# Altium PCB DSD_PLC_SMALL.PcbDoc (part 1 of 2)
Units mil, origin at the board's own origin, x right, y up, seen from the top; angles counter-clockwise.
Board outline 2820 x 3490 mil, 2 copper layers (Top Layer, Bottom Layer); 165 components, 153 nets, 500 pads, 145 vias.
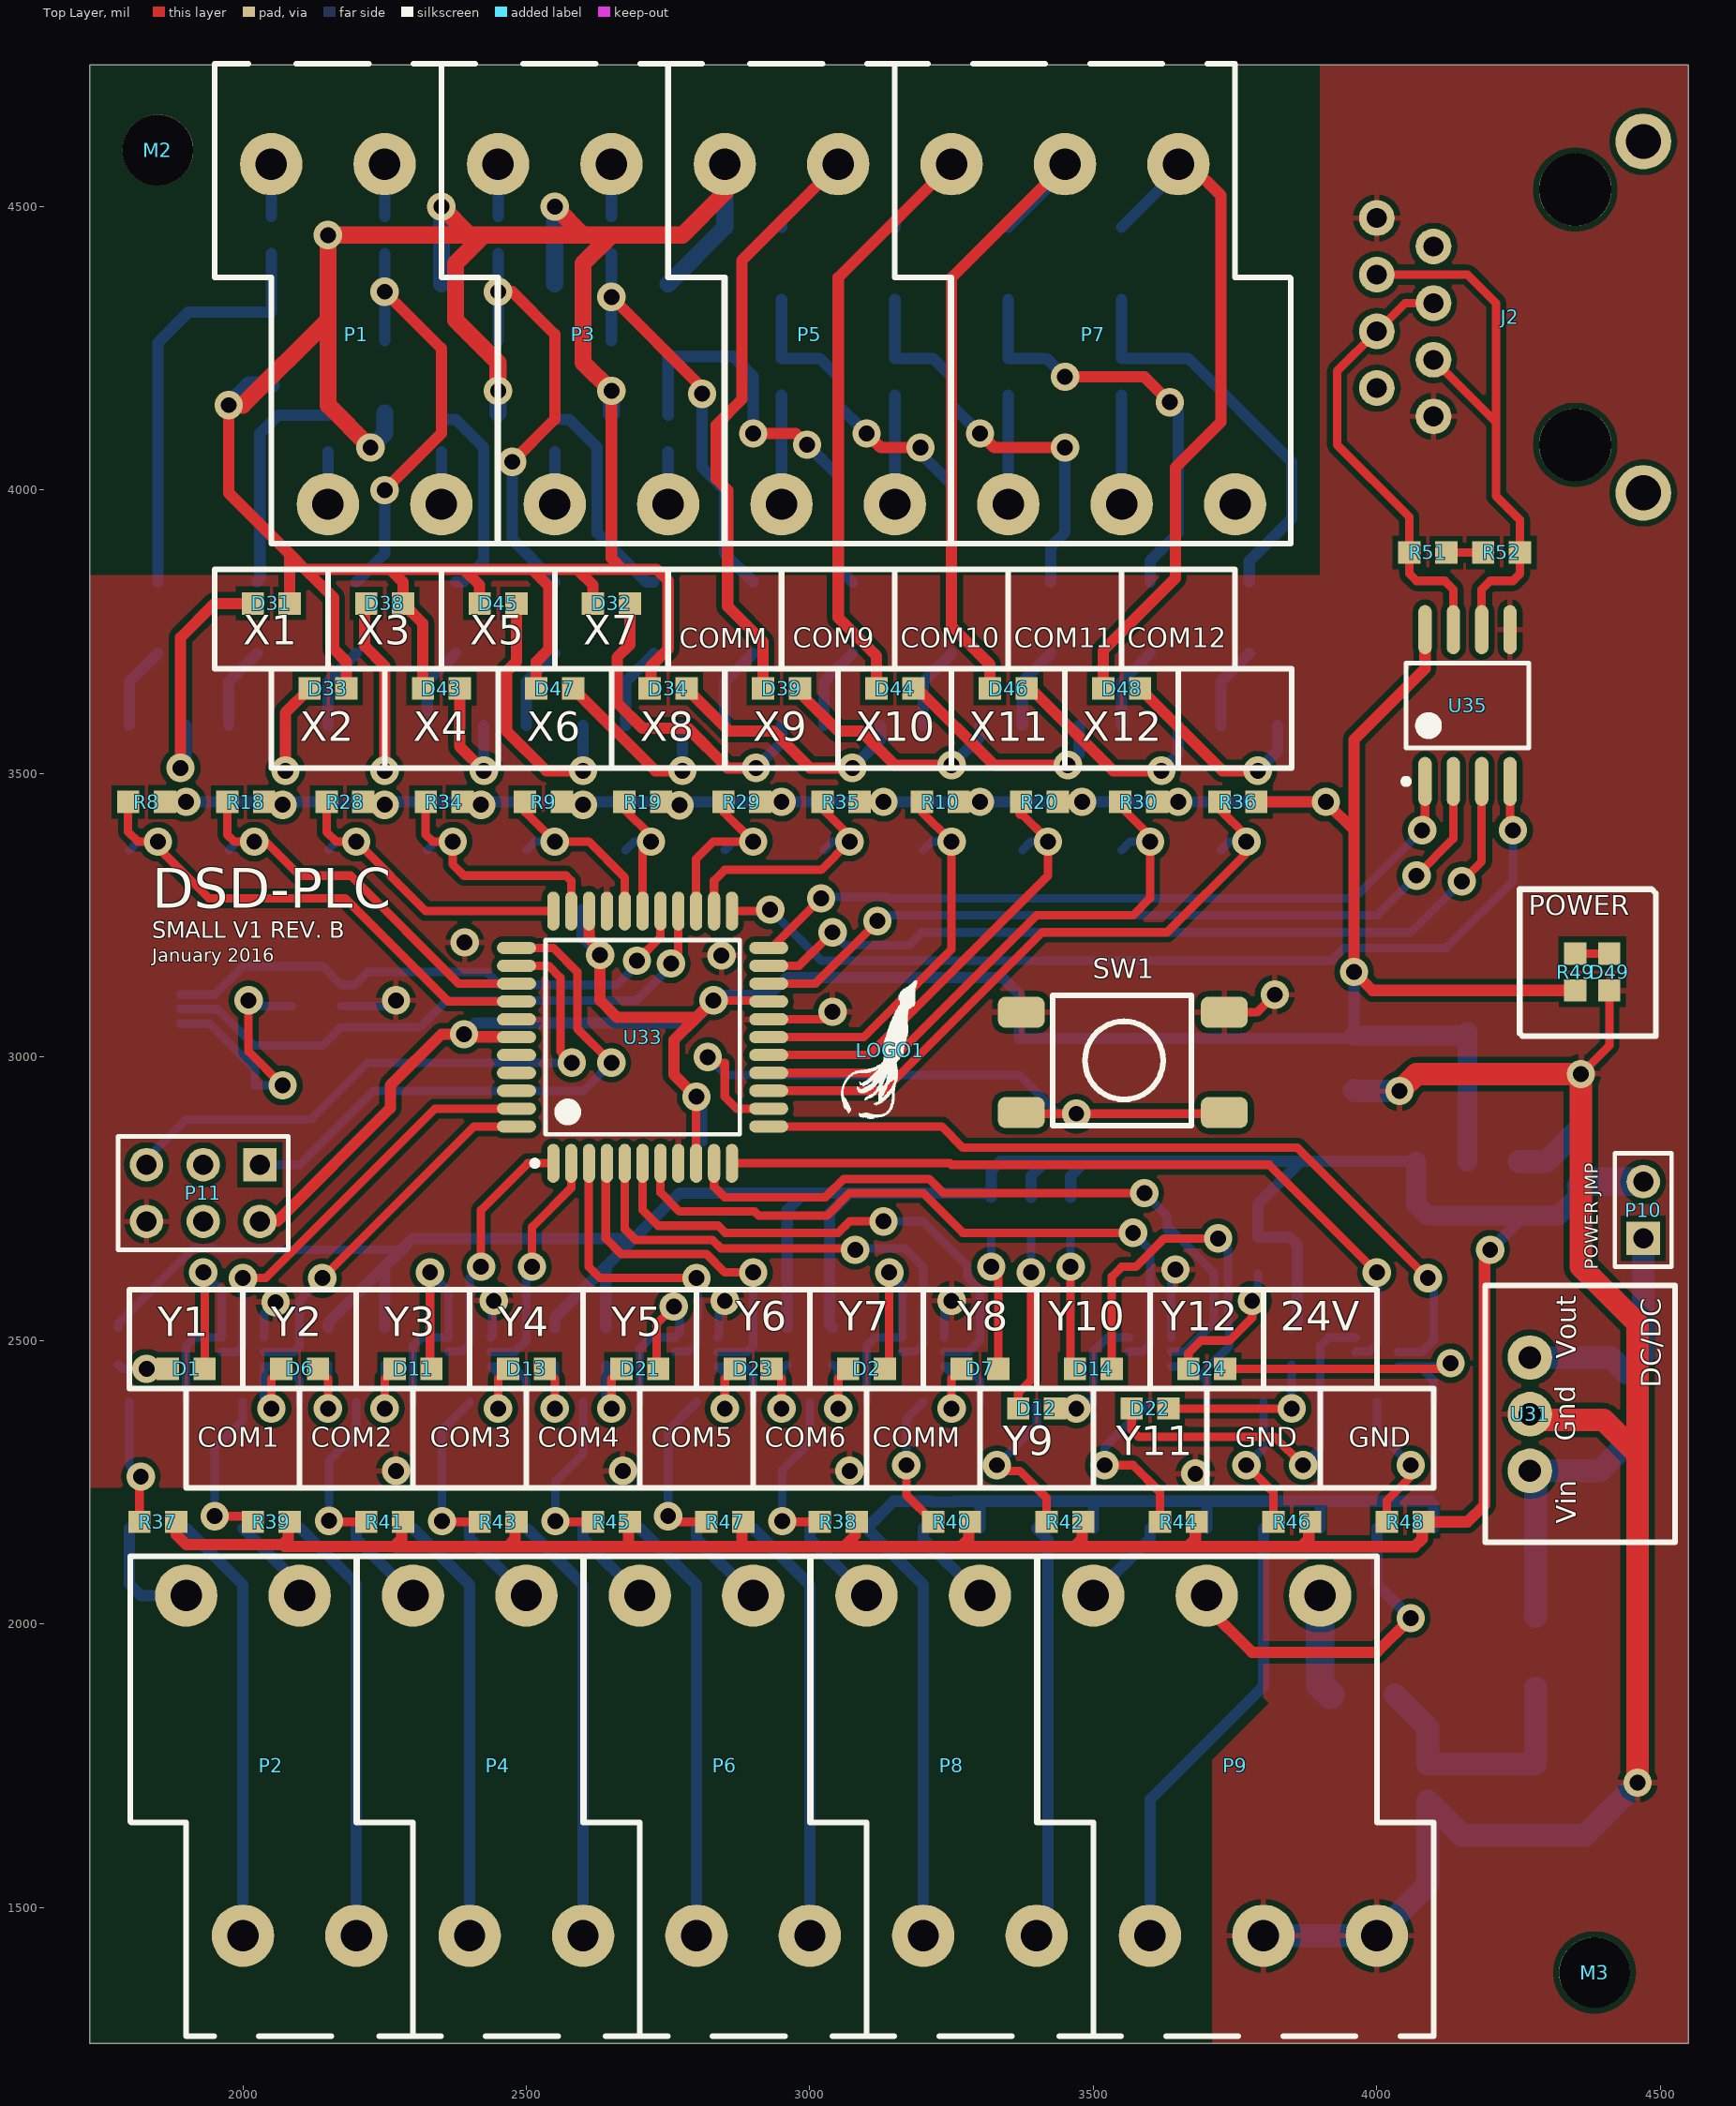
[diagram p0: Top Layer view]
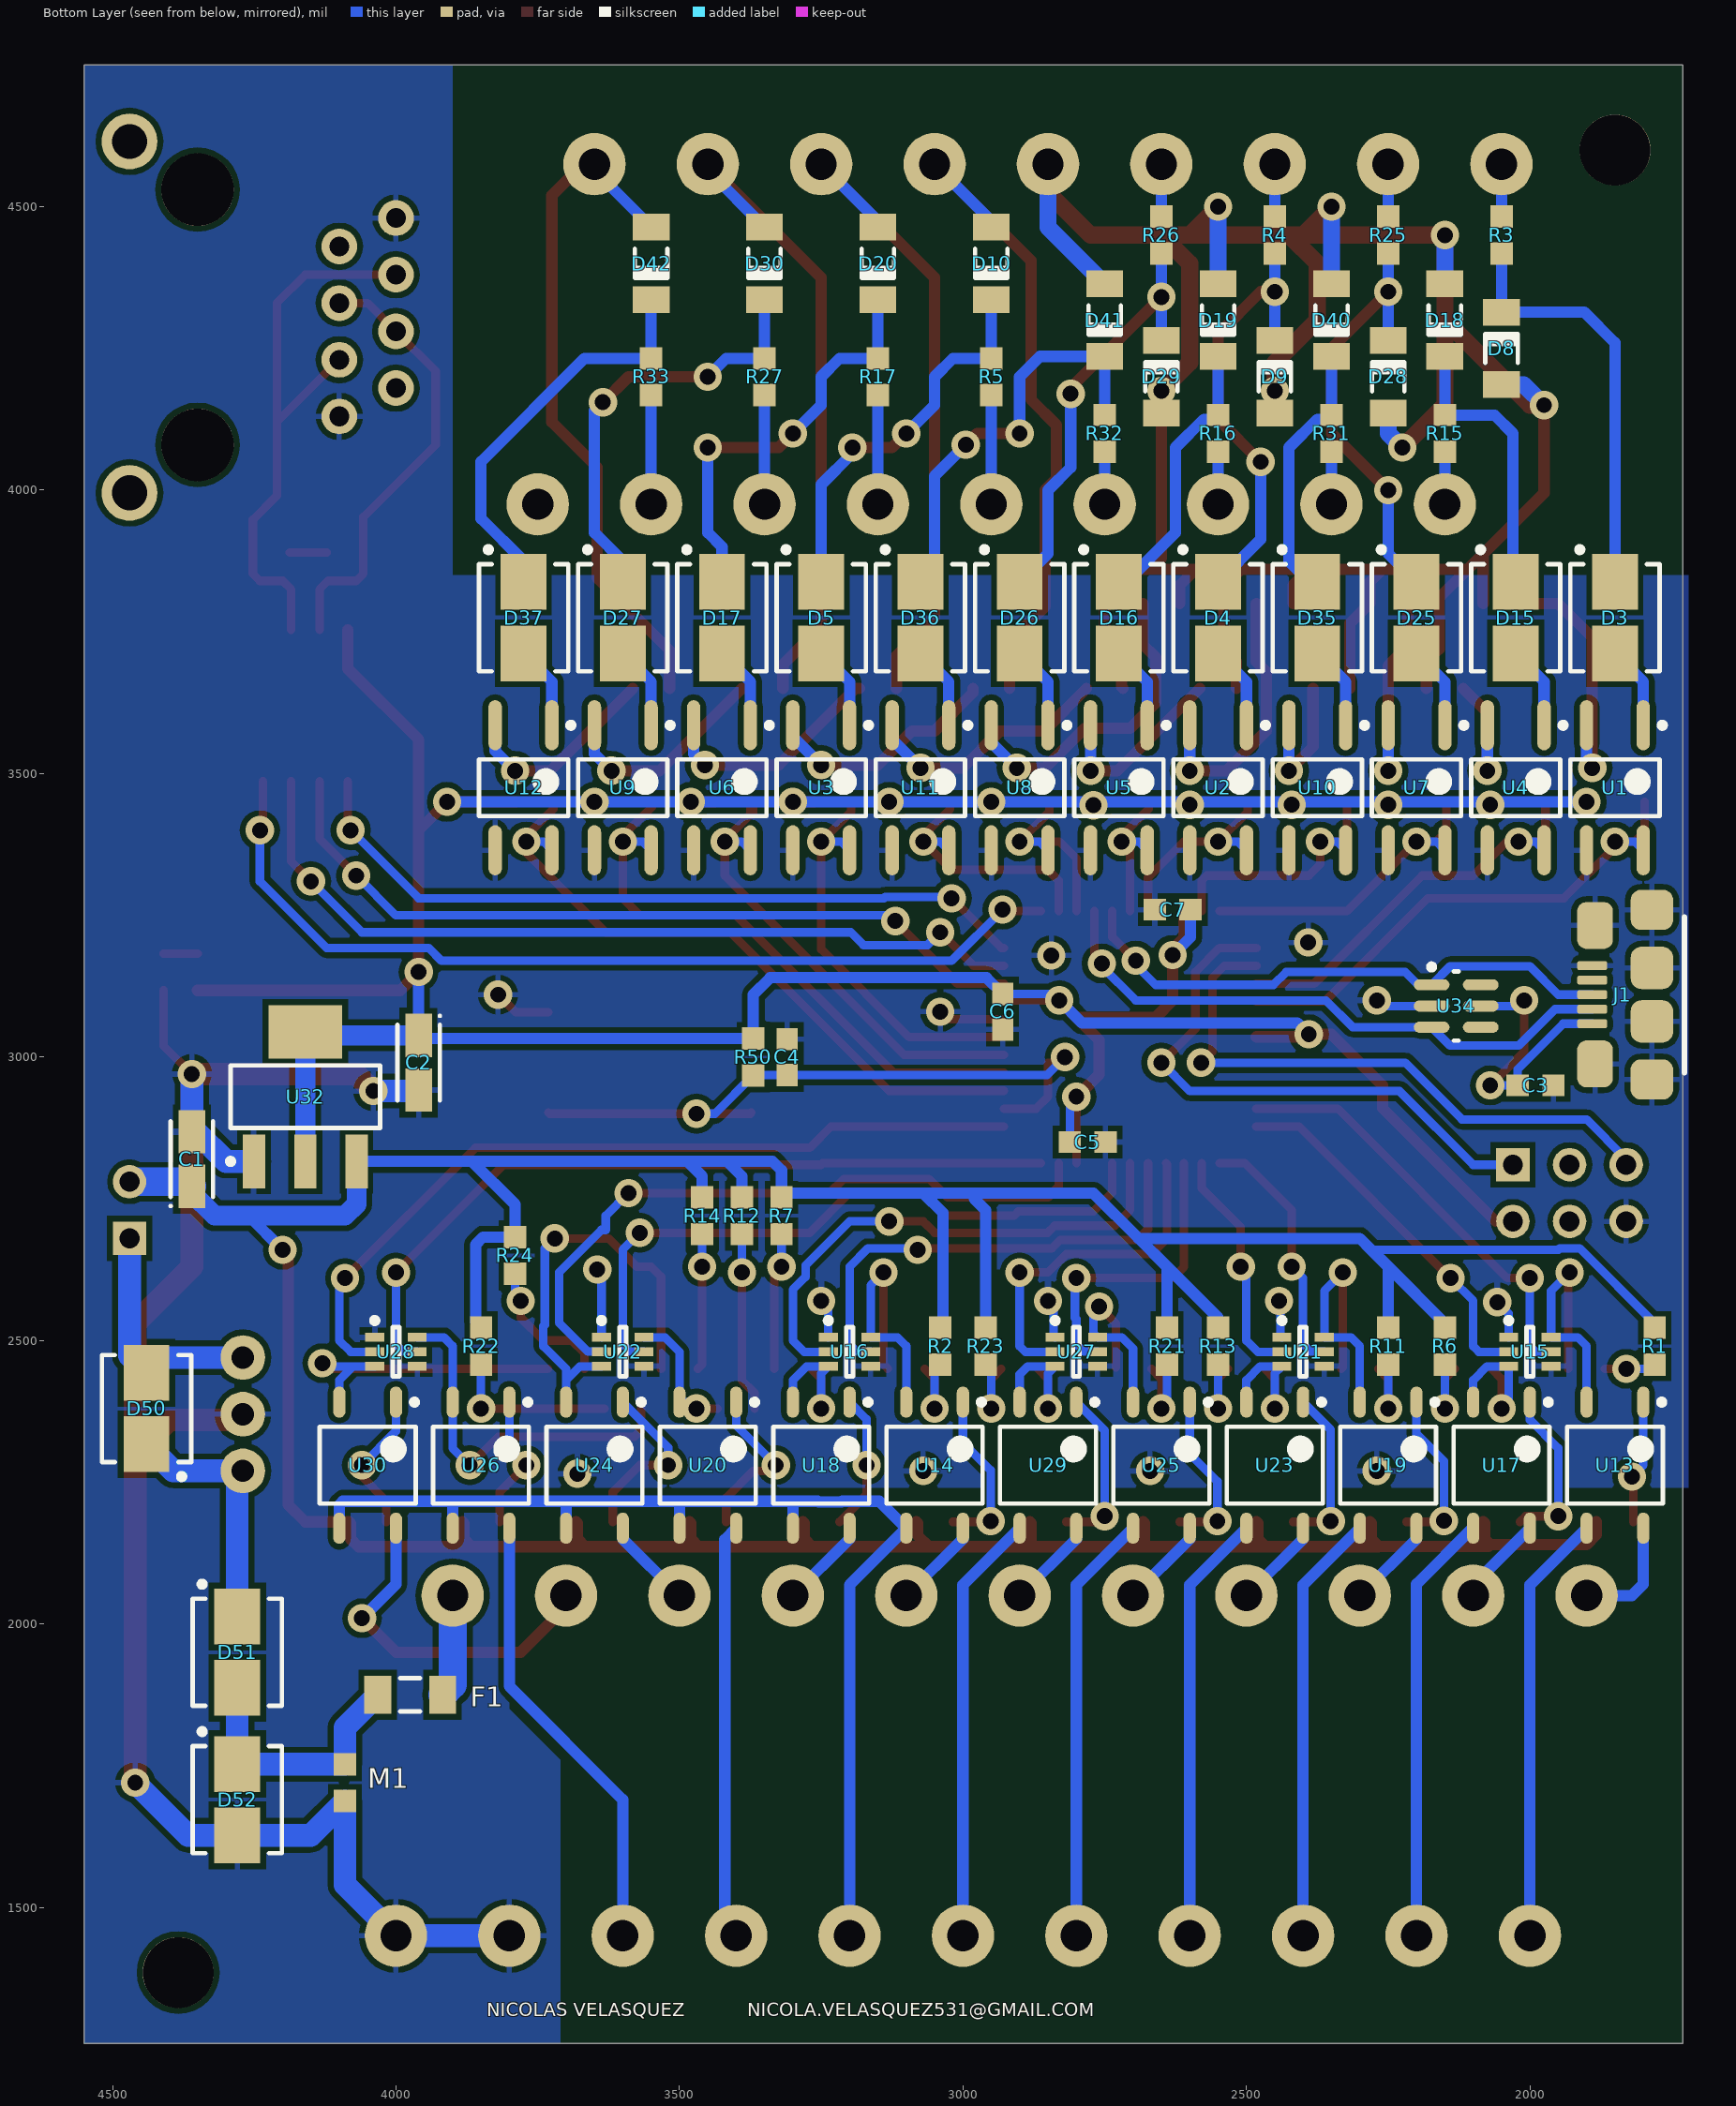
[diagram p1: Bottom Layer view, seen from below]

## Layer stack, top to bottom
Top Solder: solder mask 0.4, Solder Resist, Dk 3.5
Top Layer: signal copper 1.4
Dielectric1: dielectric 12.6, FR-4, Dk 4.8
Bottom Layer: signal copper 1.4
Bottom Solder: solder mask 0.4, Solder Resist, Dk 3.5

## Board outline
1730,4750 4550,4750 4550,1260 1730,1260 1730,4750

## Design rules (kind name [scope] priority, off if disabled: settings)
Clearance Fine_pitch [(HasFootprint('44A_N') OR HasFootprint('USB_MICRO_SMD') OR HasFootprint('SOT363_N')) vs (HasFootprint('44A_N') OR HasFootprint('USB_MICRO_SMD') OR HasFootprint('SOT363_N'))] p1: gap=8
Clearance [All] p2: gap=10
ComponentClearance Conection_blocks [(HasFootprint('block_conn 2 x 2') OR HasFootprint('block_conn 2 x 3')) vs (HasFootprint('block_conn 2 x 2') OR HasFootprint('block_conn 2 x 3'))] p1: gap=0 collisioncheckmode=3 verticalgap=0 showdistances=FALSE
ComponentClearance [All] p2: gap=10 collisioncheckmode=3 verticalgap=10 showdistances=FALSE
MinimumSolderMaskSliver [All] p1: minsoldermaskwidth=1
PolygonConnect [All] p1: connectstyle=Relief reliefconductorwidth=10 reliefentries=4 polygonreliefangle="90 Angle" airgapwidth=10
RoutingVias [All] p1: holewidth=28 width=50 viastyle="Through Hole" minholewidth=28 minwidth=50 maxholewidth=28 maxwidth=50
ShortCircuit ShortCircuit_1 [All] p1: allowed=FALSE
ShortCircuit [All] p2: allowed=FALSE
SilkToSilkClearance [All] p1: silktosilkclearance=5
SilkToSolderMaskClearance [IsPad] p1: minsilkscreentomaskgap=5 clearancetoexposedcopper=TRUE
SolderMaskExpansion SolderMaskExpansion_vias [IsVia] p1: expansion=-50
SolderMaskExpansion [All] p2: expansion=4
Width Width_Power [(InNet('3V3') OR InNet('5V') OR InNet('24V') OR InNet('IN_GND') OR InNet('COMM'))] p1: maxlimit=50 minlimit=15 preferedwidth=20
Width [All] p2: maxlimit=40 minlimit=10 preferedwidth=15
25 further rules are at their usual default settings.

## Classes and differential pairs
component class DSDPLC_IO: D1 D2 D3 D4 D5 D6 D7 D8 D9 D10 D11 D12 D13 D14 D15 D16 D17 D18 D19 D20 D21 D22 D23 D24 D25 D26 D27 D28 D29 D30 D31 D32 D33 D34 D35 D36 D37 D38 D39 D40 D41 D42 D43 D44 D45 D46 D47 D48 P1 P2 P3 P4 P5 P6 P7 P8 P9 R1 R2 R3 R4 R5 R6 R7 R8 R9 R10 R11 R12 R13 R14 R15 R16 R17 R18 R19 R20 R21 R22 R23 R24 R25 R26 R27 R28 R29 R30 R31 R32 R33 R34 R35 R36 R37 R38 R39 R40 R41 R42 R43 R44 R45 R46 R47 R48 U1 U2 U3 U4 U5 U6 U7 U8 U9 U10 U11 U12 U13 U14 U15 U16 U17 U18 U19 U20 U21 U22 U23 U24 U25 U26 U27 U28 U29 U30
component class DSDPLC_MCU: C1 C2 C3 C4 C5 C6 C7 D49 D50 D51 D52 F1 J1 J2 LOGO1 M1 M2 M3 P10 P11 R49 R50 R51 R52 R62 SW1 U31 U32 U33 U34 U35

## Components (designator, comment, footprint, x,y, rotation, side; value= is the part's Value field where it differs from the comment)
C1 "10uF" C_TANT_A_3216_N 4360,2820 r90 bottom
C2 "10uF" C_TANT_A_3216_N 3960,2990 r270 bottom
C3 "0.1uF" C0603_N 1990,2950 r0 bottom
C4 "0.1uF" C0603_N 3310,3000 r90 bottom
C5 "0.1uF" C0603_N 2780,2850 r0 bottom
C6 "0.1uF" C0603_N 2930,3080 r90 bottom
C7 "0.1uF" C0603_N 2630,3260 r180 bottom
D1 "Green" R0603_N 1900,2450 r0 top
D2 "Green" R0603_N 3100,2450 r0 top
D3 "SMBJ5344B-TP" SMB_N 1850,3775 r90 bottom
D4 "SMBJ5344B-TP" SMB_N 2550,3775 r90 bottom
D5 "SMBJ5344B-TP" SMB_N 3250,3775 r90 bottom
D6 "Green" R0603_N 2100,2450 r180 top
D7 "Green" R0603_N 3300,2450 r180 top
D8 "LL4148" SOD-80_N 2050,4250 r90 bottom
D9 "LL4148" SOD-80_N 2450,4200 r90 bottom
D10 "LL4148" SOD-80_N 2950,4400 r270 bottom
D11 "Green" R0603_N 2300,2450 r0 top
D12 "Green" R0603_N 3400,2380 r0 top
D13 "Green" R0603_N 2500,2450 r180 top
D14 "Green" R0603_N 3500,2450 r0 top
D15 "SMBJ5344B-TP" SMB_N 2025,3775 r90 bottom
D16 "SMBJ5344B-TP" SMB_N 2725,3775 r90 bottom
D17 "SMBJ5344B-TP" SMB_N 3425,3775 r90 bottom
D18 "LL4148" SOD-80_N 2150,4300 r270 bottom
D19 "LL4148" SOD-80_N 2550,4300 r270 bottom
D20 "LL4148" SOD-80_N 3150,4400 r270 bottom
D21 "Green" R0603_N 2700,2450 r0 top
D22 "Green" R0603_N 3600,2380 r180 top
D23 "Green" R0603_N 2900,2450 r180 top
D24 "Green" R0603_N 3700,2450 r0 top
D25 "SMBJ5344B-TP" SMB_N 2200,3775 r90 bottom
D26 "SMBJ5344B-TP" SMB_N 2900,3775 r90 bottom
D27 "SMBJ5344B-TP" SMB_N 3600,3775 r90 bottom
D28 "LL4148" SOD-80_N 2250,4200 r90 bottom
D29 "LL4148" SOD-80_N 2650,4200 r90 bottom
D30 "LL4148" SOD-80_N 3350,4400 r270 bottom
D31 "Green" R0603_N 2050,3800 r0 top
D32 "Green" R0603_N 2650,3800 r180 top
D33 "Green" R0603_N 2150,3650 r0 top
D34 "Green" R0603_N 2750,3650 r180 top
D35 "SMBJ5344B-TP" SMB_N 2375,3775 r90 bottom
D36 "SMBJ5344B-TP" SMB_N 3075,3775 r90 bottom
D37 "SMBJ5344B-TP" SMB_N 3775,3775 r90 bottom
D38 "Green" R0603_N 2250,3800 r0 top
D39 "Green" R0603_N 2950,3650 r180 top
D40 "LL4148" SOD-80_N 2350,4300 r270 bottom
D41 "LL4148" SOD-80_N 2750,4300 r270 bottom
D42 "LL4148" SOD-80_N 3550,4400 r270 bottom
D43 "Green" R0603_N 2350,3650 r180 top
D44 "Green" R0603_N 3150,3650 r180 top
D45 "Green" R0603_N 2450,3800 r180 top
D46 "Green" R0603_N 3350,3650 r180 top
D47 "Green" R0603_N 2550,3650 r180 top
D48 "Green" R0603_N 3550,3650 r180 top
D49 "Green" R0603_N 4410,3150 r270 top
D50 "S1BB-13-F" SMB_N 4440,2380 r270 bottom
D51 "S1BB-13-F" SMB_N 4280,1950 r90 bottom
D52 "S1BB-13-F" SMB_N 4280,1690 r90 bottom
F1 "1206L150THWR" R1206_N 3975,1875 r0 bottom
J1 "MICRO_USB" USB_MICRO_SMD 1890,3110 r90 bottom
J2 "RJ45" rj45 4100,4130 r90 top
LOGO1 "Logo_DeepSea" DeepSea_logo1 3142,3012 r0 top
M1 "EZJ-Z1V420FA" R0603_N 4090,1720 r270 bottom
M2 "MountingHole-1/8in" MoutingHole-1/8in 1850,4600 r0 top
M3 "MountingHole-1/8in" MoutingHole-1/8in 4384,1385 r0 top
P1 "BLOCK_CONN2X2" "block_conn 2 x 2" 2350,3975 r180 top
P2 "BLOCK_CONN2X2" "block_conn 2 x 2" 1900,2050 r0 top
P3 "BLOCK_CONN2X2" "block_conn 2 x 2" 2750,3975 r180 top
P4 "BLOCK_CONN2X2" "block_conn 2 x 2" 2300,2050 r0 top
P5 "BLOCK_CONN2X2" "block_conn 2 x 2" 3150,3975 r180 top
P6 "BLOCK_CONN2X2" "block_conn 2 x 2" 2700,2050 r0 top
P7 "BLOCK_CONN2X3" "block_conn 2 x 3" 3750,3975 r180 top
P8 "BLOCK_CONN2X2" "block_conn 2 x 2" 3100,2050 r0 top
P9 "BLOCK_CONN2X3" "block_conn 2 x 3" 3500,2050 r0 top
P10 "Header 2" HDR1X2 4470,2680 r90 top
P11 "Header 3X2" HDR2X3 2030,2810 r180 top
R1 "R_SMD" R0603_N 1780,2490 r270 bottom
R2 "R_SMD" R0603_N 3040,2490 r270 bottom
R3 "R_SMD" R0603_N 2050,4450 r90 bottom
R4 "R_SMD" R0603_N 2450,4450 r90 bottom
R5 "R_SMD" R0603_N 2950,4200 r270 bottom
R6 "R_SMD" R0603_N 2150,2490 r270 bottom
R7 "R_SMD" R0603_N 3320,2720 r270 bottom
R8 "R_SMD" R0603_N 1830,3450 r0 top
R9 "R_SMD" R0603_N 2530,3450 r0 top
R10 "R_SMD" R0603_N 3230,3450 r0 top
R11 "R_SMD" R0603_N 2250,2490 r270 bottom
R12 "R_SMD" R0603_N 3390,2720 r270 bottom
R13 "R_SMD" R0603_N 2550,2490 r270 bottom
R14 "R_SMD" R0603_N 3460,2720 r270 bottom
R15 "R_SMD" R0603_N 2150,4100 r270 bottom
R16 "R_SMD" R0603_N 2550,4100 r270 bottom
R17 "R_SMD" R0603_N 3150,4200 r270 bottom
R18 "R_SMD" R0603_N 2005,3450 r0 top
R19 "R_SMD" R0603_N 2705,3450 r0 top
R20 "R_SMD" R0603_N 3405,3450 r0 top
R21 "R_SMD" R0603_N 2640,2490 r270 bottom
R22 "R_SMD" R0603_N 3850,2490 r270 bottom
R23 "R_SMD" R0603_N 2960,2490 r270 bottom
R24 "R_SMD" R0603_N 3790,2650 r270 bottom
R25 "R_SMD" R0603_N 2250,4450 r90 bottom
R26 "R_SMD" R0603_N 2650,4450 r90 bottom
R27 "R_SMD" R0603_N 3350,4200 r270 bottom
R28 "R_SMD" R0603_N 2180,3450 r0 top
R29 "R_SMD" R0603_N 2880,3450 r0 top
R30 "R_SMD" R0603_N 3580,3450 r0 top
R31 "R_SMD" R0603_N 2350,4100 r270 bottom
R32 "R_SMD" R0603_N 2750,4100 r270 bottom
R33 "R_SMD" R0603_N 3550,4200 r270 bottom
R34 "R_SMD" R0603_N 2355,3450 r0 top
R35 "R_SMD" R0603_N 3055,3450 r0 top
R36 "R_SMD" R0603_N 3755,3450 r0 top
R37 "R_SMD" R0603_N 1850,2180 r0 top
R38 "R_SMD" R0603_N 3050,2180 r0 top
R39 "R_SMD" R0603_N 2050,2180 r0 top
R40 "R_SMD" R0603_N 3250,2180 r0 top
R41 "R_SMD" R0603_N 2250,2180 r0 top
R42 "R_SMD" R0603_N 3450,2180 r0 top
R43 "R_SMD" R0603_N 2450,2180 r0 top
R44 "R_SMD" R0603_N 3650,2180 r0 top
R45 "R_SMD" R0603_N 2650,2180 r0 top
R46 "R_SMD" R0603_N 3850,2180 r0 top
R47 "R_SMD" R0603_N 2850,2180 r0 top
R48 "R_SMD" R0603_N 4050,2180 r0 top
R49 "R_SMD" R0603_N 4350,3150 r90 top
R50 "10K" R0603_N 3370,3000 r90 bottom
R51 "120" R0603_N 4090,3890 r180 top
R52 "0R" R0603_N 4220,3890 r180 top
SW1 "SWITCH" swich_foot 3373,3079 r0 top
U1 "TLP185(GR,E)" "SOIC6 (4 leads)" 1850,3475 r270 bottom
U2 "TLP185(GR,E)" "SOIC6 (4 leads)" 2550,3475 r270 bottom
U3 "TLP185(GR,E)" "SOIC6 (4 leads)" 3250,3475 r270 bottom
U4 "TLP185(GR,E)" "SOIC6 (4 leads)" 2025,3475 r270 bottom
U5 "TLP185(GR,E)" "SOIC6 (4 leads)" 2725,3475 r270 bottom
U6 "TLP185(GR,E)" "SOIC6 (4 leads)" 3425,3475 r270 bottom
U7 "TLP185(GR,E)" "SOIC6 (4 leads)" 2200,3475 r270 bottom
U8 "TLP185(GR,E)" "SOIC6 (4 leads)" 2900,3475 r270 bottom
U9 "TLP185(GR,E)" "SOIC6 (4 leads)" 3600,3475 r270 bottom
U10 "TLP185(GR,E)" "SOIC6 (4 leads)" 2375,3475 r270 bottom
U11 "TLP185(GR,E)" "SOIC6 (4 leads)" 3075,3475 r270 bottom
U12 "TLP185(GR,E)" "SOIC6 (4 leads)" 3775,3475 r270 bottom
U13 "CPC1020NTR" SOP4_N 1850,2280 r270 bottom
U14 "CPC1020NTR" SOP4_N 3050,2280 r270 bottom
U15 "MUN5213DW1T1G" SOT363_N 2000,2480 r180 bottom
U16 "MUN5213DW1T1G" SOT363_N 3200,2480 r180 bottom
U17 "CPC1020NTR" SOP4_N 2050,2280 r270 bottom
U18 "CPC1020NTR" SOP4_N 3250,2280 r270 bottom
U19 "CPC1020NTR" SOP4_N 2250,2280 r270 bottom
U20 "CPC1020NTR" SOP4_N 3450,2280 r270 bottom
U21 "MUN5213DW1T1G" SOT363_N 2400,2480 r180 bottom
U22 "MUN5213DW1T1G" SOT363_N 3600,2480 r180 bottom
U23 "CPC1020NTR" SOP4_N 2450,2280 r270 bottom
U24 "CPC1020NTR" SOP4_N 3650,2280 r270 bottom
U25 "CPC1020NTR" SOP4_N 2650,2280 r270 bottom
U26 "CPC1020NTR" SOP4_N 3850,2280 r270 bottom
U27 "MUN5213DW1T1G" SOT363_N 2800,2480 r180 bottom
U28 "MUN5213DW1T1G" SOT363_N 4000,2480 r180 bottom
U29 "CPC1020NTR" SOP4_N 2850,2280 r270 bottom
U30 "CPC1020NTR" SOP4_N 4050,2280 r270 bottom
U31 "R-78B5.0-1.0" SIP3_RECOM 4270,2270 r90 top
U32 "LM1117MPX-3.3/NOPB" MP04A_N 4160,2930 r90 bottom
U33 "ATXMEGA32A4U-AU" 44A_N 2705,3035 r90 top
U34 "IP4220CZ6,125" SOT457_N 2130,3090 r180 bottom
U35 "ST3485ECDR" SOIC8WA_N 4160,3620 r90 top

## Footprints (in the part's own frame and the unit in brackets; to place one, negate y for a bottom-side part, rotate by r counter-clockwise, add the part's x,y. Pads: shape width x height; smd on the part's side, far side on the other; paste and mask are expansions set on the pad)
44A_N [mm] "Thin QFP, 44-Leads, Body 10x10mm, Pitch 0.8mm, IPC Medium Density"
  oval 1.75x0.55 smd: 1(-5.65,4) 2(-5.65,3.2) 3(-5.65,2.4) 4(-5.65,1.6) 5(-5.65,0.8) 6(-5.65,0) 7(-5.65,-0.8) 8(-5.65,-1.6) 9(-5.65,-2.4) 10(-5.65,-3.2) 11(-5.65,-4) 23(5.65,-4) 24(5.65,-3.2) 25(5.65,-2.4) 26(5.65,-1.6) 27(5.65,-0.8) 28(5.65,0) 29(5.65,0.8) 30(5.65,1.6) 31(5.65,2.4) 32(5.65,3.2) 33(5.65,4)
  oval 0.55x1.75 smd: 12(-4,-5.65) 13(-3.2,-5.65) 14(-2.4,-5.65) 15(-1.6,-5.65) 16(-0.8,-5.65) 17(0,-5.65) 18(0.8,-5.65) 19(1.6,-5.65) 20(2.4,-5.65) 21(3.2,-5.65) 22(4,-5.65) 34(4,5.65) 35(3.2,5.65) 36(2.4,5.65) 37(1.6,5.65) 38(0.8,5.65) 39(0,5.65) 40(-0.8,5.65) 41(-1.6,5.65) 42(-2.4,5.65) 43(-3.2,5.65) 44(-4,5.65)
  silkscreen extent -5.77,-4.35 4.35,4.95, body extent -5,-5 5,5, height 1.2
"block_conn 2 x 2" [mil]
  round 110 hole 55.12: 1(0,0) 2(100,-600) 3(200,0) 4(300,-600)
  silkscreen extent -98,-778 400,69
"block_conn 2 x 3" [mil]
  round 110 hole 55.12: 1(0,0) 2(100,-600) 3(200,0) 4(300,-600) 5(400,0) 6(500,-600)
  silkscreen extent -98,-778 600,69
C0603_N [mm] "Chip Capacitor, 2-Leads, Body 1,60x0,80mm, IPC Medium Density"
  rect 1x0.95 smd: 1(-0.8,0) 2(0.8,0)
  body extent -0.88,-0.48 0.87,0.48, height 0.85
C_TANT_A_3216_N [mm] "Molded Capacitor, 2-Leads, Body 3,20x1,60mm, IPC Medium Density"
  rect 1.95x1.2 smd: 1(-1.225,0) 2(1.225,0)
  silkscreen extent -2.15,-0.95 1.7,1, body extent -1.7,-0.9 1.7,0.9, height 1.8
DeepSea_logo1 [mil]
  silkscreen extent -87,-120 47,123
HDR1X2 [mm] "Connector; Header; 2 Position"
  rect 1.5x1.5 hole 0.9: 1(0,0)
  round 1.5 hole 0.9: 2(2.54,0)
  silkscreen extent -1.27,-1.27 3.81,1.27
HDR2X3 [mm] "Connector; Header; 3x2 Position"
  rect 1.5x1.5 hole 0.9: 1(0,0)
  round 1.5 hole 0.9: 2(0,2.54) 3(2.54,0) 4(2.54,2.54) 5(5.08,0) 6(5.08,2.54)
  silkscreen extent -1.27,-1.27 6.35,3.81
MoutingHole-1/8in [mil]
  round 125 hole 125: 0(0,0)
MP04A_N [mm] "SOT223, 4-Leads, Body 6.5x3.5mm, Pitch 2.3mm, Lead Span 7mm, IPC Medium Density"
  rect 2.4x1 smd: 1(-2.9,2.3) 2(-2.9,0) 3(-2.9,-2.3)
  rect 2.4x3.3 smd: 4(2.9,0)
  silkscreen extent -3.02,-3.35 1.4,3.48, body extent -1.85,-3.35 1.85,3.35, height 1.8
R0603_N [mm] "Chip Resistor, 2-Leads, Body 1,60x0,85mm, IPC Medium Density"
  rect 1x1 smd: 1(-0.825,0) 2(0.825,0)
  body extent -0.87,-0.48 0.87,0.47, height 0.45
R1206_N [mm] "Chip Resistor, 2-Leads, Body 3,13x1,55mm, IPC Medium Density"
  rect 1.2x1.7 smd: 1(-1.45,0) 2(1.45,0)
  silkscreen extent -0.45,-0.75 0.45,0.75, body extent -1.63,-0.82 1.63,0.82, height 0.6
rj45 [mm]
  round 1.6 hole 0.89: 1(0,0) 2(1.27,2.54) 3(2.54,0) 4(3.81,2.54) 5(5.08,0) 6(6.35,2.54) 7(7.62,0) 8(8.89,2.54)
  round 2.5 hole 1.575: SHIELD(-3.429,-9.398)
  round 2.5 hole 1.57: SHIELD(12.319,-9.398)
  round 3.25 hole 3.25: ""(-1.27,-6.35) ""(10.16,-6.35)
  body extent -3.68,-14.48 12.7,4.19, height 12.57
SIP3_RECOM [mm]
  round 2 hole 1: 1(0,0) 2(2.54,0) 3(5.08,0)
  silkscreen extent -3.2,-6.5 8.3,2, body extent -3.2,-6.5 8.3,2, height 17.5
SMB_N [mm] "Molded Diode, 2-Leads, Body 4,41x3,62mm, IPC Medium Density"
  rect 2.5x2.05 smd: 1(-1.6,0) 2(1.6,0)
  silkscreen extent -2.4,-2 3.17,2, body extent -2.37,-1.97 2.38,1.97, height 2.42
SOD-80_N [mm] "MELF Diode, 2-Leads, Body 3,45x1,40mm, IPC Medium Density"
  rect 1.2x1.65 smd: 1(-1.625,0) 2(1.625,0)
  silkscreen extent -0.65,-0.73 0.65,0.72, body extent -1.8,-0.75 1.8,0.75, height 1.49
"SOIC6 (4 leads)" [mm] "SOIC, SMD 6, 4-Leads, Body 3,75x4,60mm, Pitch 1,27mm, IPC Medium Density"
  oval 2.25x0.6 smd: 1(-2.8,1.27) 3(-2.8,-1.27) 4(2.8,-1.27) 6(2.8,1.27)
  silkscreen extent -2.92,-2 1.28,2.24, body extent -2.4,-2 2.4,2, height 2.2
SOIC8WA_N [mm] "SOP, 8-Leads, Body 5.3x5.3mm, Pitch 1.27mm, IPC Medium Density"
  oval 2.2x0.6 smd: 1(-3.4,1.905) 2(-3.4,0.635) 3(-3.4,-0.635) 4(-3.4,-1.905) 5(3.4,-1.905) 6(3.4,-0.635) 7(3.4,0.635) 8(3.4,1.905)
  silkscreen extent -3.52,-2.75 1.9,2.88, body extent -2.73,-2.75 2.73,2.75, height 2.13
SOP4_N [mm] "SOP, 4-Leads, Body 4,09x3,81mm, Pitch 2,54mm, IPC Medium Density"
  oval 1.4x0.55 smd: 1(-2.825,1.27) 2(-2.825,-1.27) 3(2.825,-1.27) 4(2.825,1.27)
  silkscreen extent -2.95,-2.15 1.73,2.22, body extent -1.95,-2.15 1.95,2.15, height 2.19
SOT363_N [mm] "SOT363, 6-Leads, Body 2x1.3mm, Pitch 0.65mm, Lead Span 2.1mm, IPC Medium Density"
  rect 0.85x0.4 smd: 1(-0.95,0.65) 2(-0.95,0) 3(-0.95,-0.65) 4(0.95,-0.65) 5(0.95,0) 6(0.95,0.65)
  silkscreen extent -1.07,-1.1 0.15,1.52, body extent -0.7,-1.1 0.7,1.1, height 1.1
SOT457_N [mm] "TSOP, 6-Leads, Body 2,90x1,50mm, Pitch 0,95mm, IPC Medium Density"
  oval 1.6x0.5 smd: 1(-1.1,0.95) 2(-1.1,0) 3(-1.1,-0.95) 4(1.1,-0.95) 5(1.1,0) 6(1.1,0.95)
  silkscreen extent -1.23,-1.55 0.1,1.87, body extent -0.85,-1.55 0.85,1.55, height 1.1
swich_foot [mil]
  rrect50% 83x55 smd: 1(0,0) 1(358,0) 2(0,-177) 2(358,-177)
  silkscreen extent 55,-200 300,30, body extent 57,-201 300,29, height 138
USB_MICRO_SMD [mm]
  rrect50% 0.4x1.35 smd: 1(-1.3,0) 2(-0.65,0) 3(0,0) 4(0.65,0) 5(1.3,0)
  rrect50% 1.8x1.9 smd: shd(-3.8,-2.67) shd(3.8,-2.675)
  rrect50% 2.1x1.6 smd: shd(-3.1,-0.125) shd(3.1,-0.125)
  rrect50% 1.9x1.9 smd: shd(-1.2,-2.675) shd(1.2,-2.675)
  silkscreen extent -3.5,-4.13 3.47,-4.13, body extent -3.96,-5.1 4.01,0.32, height 2.68

## Part data
C1 C2: library part CP_SMD
C3 C4 C5 C6 C7: library part C_SMD
D1 D2 D6 D7 D11 D12 D13 D14 D21 D22 D23 D24 D31 D32 D33 D34 D38 D39 D43 D44 D45 D46 D47 D48 D49: library part LED_SMD
D3 D4 D5 D15 D16 D17 D25 D26 D27 D35 D36 D37: "DIODE ZENER 8.2V 5W DO214AA"
D8 D9 D10 D18 D19 D20 D28 D29 D30 D40 D41 D42: "DIODE SMALL SIG 100V 0.2A SOD80"
D50 D51 D52: "DIODE GEN PURPOSE 100V 1A SMB"
F1: "FUSE PTC RESET 8V 1.50A 1206"
J1: "CONN USB MICRO B RECPT SMT R/A"
J2: "CONN MOD JACK R/A 8P8C SHIELDED"
M1: "VARISTOR 42V 15A 0603"
P1 P2 P3 P4 P5 P6 P8: "TERM BLOCK 2POS STACK 5.08MM PC"
P7 P9: "TERM BLOCK 3POS STACK 5.08MM PC"
P10: "Header, 2-Pin"
P11: "Header, 3-Pin, Dual row"
R50 R51 R52: library part R_SMD
SW1: "SWITCH TACTILE SPST-NO 0.05A 12V"
U1 U2 U3 U4 U5 U6 U7 U8 U9 U10 U11 U12: "OPTOISO 3.75KV TRANS 6-SO 4 LEAD"
U13 U14 U17 U18 U19 U20 U23 U24 U25 U26 U29 U30: "RELAY OPTOMOS 1200MA 4-SOP"
U15 U16 U21 U22 U27 U28: "TRANS PREBIAS DUAL NPN SOT363"
U31: "CONV DC/DC 1A 5V OUT SIP VERT"
U32: "800mA Low-Dropout Linear Regulator, 4-pin SOT-223, Pb-Free"
U33: "IC MCU 8BIT 32KB FLASH 44TQFP"
U34: "IC USB DUAL ESD PROTECT 6TSOP"
U35: "TXRX RS485/422 3.3V ESD 8-SOIC"

## Via types
v1: diameter 50, hole 28, Top Layer to Bottom Layer, 145 vias

## Nets (pads, with @x,y where several pads share a name; then routed paths per layer and width w, separated by ;. In a path a pad name is that pad's centre, name@x,y a point inside that pad or via, vN(x,y) a via of type N, cw(c..) or ccw(c..) an arc to the next point about the centre after c; other vN are vias at no path point)
3V3: C2.1 C5.2 C6.2 C7.2 P11.2 R8.2 R9.2 R10.2 R18.2 R19.2 R20.2 R28.2 R29.2 R30.2 R34.2 R35.2 R36.2 R49.1 R50.2 U32.2 U32.4 U33.9 U33.19 U33.31 U33.39 U35.8 | length 7164.4
  Top Layer w15: U33.9@2799.49,2812.56 v1@2799.49,2929.49 ; v1(2830,3100) 2925.43,3100 U33.19@2927.44,3097.99
  Top Layer w20: P11.2@2030,2710 2060,2710 2260,2910 2260,2950 2350,3040 v1(2390,3040) 2394.33,3035.67 2481.89,3035.67 U33.39@2482.56,3035 ; U33.31@2610.51,3257.44 2610.51,3209.49 2630,3190 v1(2630,3180) 2630,3100 2660,3070 2800,3070 ; v1@2799.49,2929.49 2760,2968.98 2760,3030 2800,3070 ; v1(2830,3100) 2800,3070 ; R10.2@3262.48,3450 v1(3300,3450) ; R20.2@3437.48,3450 v1(3480,3450) ; R36.2@3787.48,3450 v1(3910,3450) 3960,3400 ; U35.8@4085,3753.86 4085,3685 3960,3560 3960,3400 ; R49.1@4350,3117.52 3992.48,3117.52 v1(3960,3150) 3960,3400
  Bottom Layer w15: v1(2800,2930) 2811.5,2918.5 C5.2@2811.5,2850 ; v1(2830,3100) 2841.5,3111.5 C6.2@2930,3111.5
  Bottom Layer w20: v1(1900,3450) v1@2075,3450 ; v1(2070,3445) v1@2075,3450 ; v1@2245,3450 v1@2075,3450 ; v1@2250,3450 v1@2425,3450 ; v1(2390,3040) 2410,3060 2790,3060 v1(2830,3100) ; v1(2420,3445) v1@2425,3450 ; v1@2595,3450 v1@2425,3450 ; C7.2@2598.5,3260 2598.5,3211.5 v1(2630,3180) ; v1@2600,3450 v1(2950,3450) v1(3130,3450) v1(3300,3450) v1(3480,3450) v1(3650,3450) v1(3910,3450) ; C6.2@2930,3111.5 2958.5,3140 3340,3140 3370,3110 R50.2@3370,3032.48 3954.25,3032.48 C2.1@3960,3038.23 v1(3960,3150)
  Bottom Layer w35: C2.1@3960,3038.23 4154.06,3038.23 U32.4@4160,3044.17 U32.2@4160,2815.83
  other v1: 2770,3444.06 2250,3445 2600,3445
5V: C1.1 P10.2 R1.1 R2.1 R6.1 R7.1 R11.1 R12.1 R13.1 R14.1 R21.1 R22.1 R23.1 R24.1 R37.2 R38.2 R39.2 R40.2 R41.2 R42.2 R43.2 R44.2 R45.2 R46.2 R47.2 R48.2 U32.3 | length 8036.1
  Top Layer w20: R37.2@1882.48,2180 1882.48,2157.52 1900,2140 2070,2140 ; R39.2@2082.48,2180 2080,2177.52 2080,2150 2070,2140 ; R41.2@2282.48,2180 2280,2177.52 2280,2150 2266.82,2136.82 ; R43.2@2482.48,2180 2480,2177.52 2480,2150 2466.21,2136.21 ; R45.2@2682.48,2180 2680,2177.52 2680,2140 2676.21,2136.21 ; R47.2@2882.48,2180 2880,2177.52 2880,2140 2876.21,2136.21 ; R38.2@3082.48,2180 3080,2177.52 3080,2156.21 3060,2136.21 ; R40.2@3282.48,2180 3280,2177.52 3280,2150 3266.21,2136.21 ; R42.2@3482.48,2180 3480,2177.52 3480,2150 3466.21,2136.21 ; R44.2@3682.48,2180 3680,2177.52 3680,2150 3666.21,2136.21 ; R46.2@3882.48,2180 3880,2177.52 3880,2150 3866.21,2136.21 ; v1(4200,2660) 4190,2650 4190,2210 4160,2180 R48.2@4082.48,2180 4080,2177.52 4080,2150 4066.21,2136.21 3866.21,2136.21 ; 2070,2140 2073.18,2136.82 2266.82,2136.82 ; 2266.82,2136.82 2267.43,2136.21 2466.21,2136.21 ; 2466.21,2136.21 2676.21,2136.21 ; 2676.21,2136.21 2876.21,2136.21 ; 2876.21,2136.21 3060,2136.21 ; 3060,2136.21 3266.21,2136.21 ; 3266.21,2136.21 3466.21,2136.21 ; 3466.21,2136.21 3666.21,2136.21 ; 3666.21,2136.21 3866.21,2136.21
  Bottom Layer w15: R1.1@1780,2522.48 1780,2530.1 1912.4,2662.5 1947.6,2662.5 1950.1,2660 2280,2660
  Bottom Layer w20: R6.1@2150,2522.48 2150,2530 2250,2630 ; R11.1@2250,2522.48 2250,2630 ; R13.1@2550,2522.48 2550,2540 2640,2630 ; R21.1@2640,2522.48 2640,2630 ; R23.1@2960,2522.48 2960,2730 2980,2750 ; R2.1@3040,2522.48 3035,2527.48 3035,2725 3070,2760 ; R12.1@3390,2752.48 3390,2790 3415.83,2815.83 ; R14.1@3460,2752.48 3460,2790 3485.83,2815.83 ; R22.1@3850,2522.48 3859.7,2532.18 3859.7,2669.14 3846.36,2682.48 R24.1@3790,2682.48 3790,2740 3865.83,2815.83 ; U32.3@4069.45,2815.83 3865.83,2815.83 ; v1(4200,2660) 4260,2720 ; 2250,2630 2280,2660 2300,2680 2690,2680 ; 2640,2630 2690,2680 ; 2690,2680 2770,2760 3070,2760 ; 3070,2760 3312.48,2760 R7.1@3320,2752.48 3320,2800 3335.83,2815.83 3415.83,2815.83 ; 3415.83,2815.83 3485.83,2815.83 ; 3485.83,2815.83 3865.83,2815.83
  Bottom Layer w35: U32.3@4069.45,2815.83 4069.45,2740.55 4090,2720 4260,2720 4320,2720 4360,2760 C1.1@4360,2771.77
  Bottom Layer w50: C1.1@4360,2771.77 4368.23,2780 P10.2@4470,2780
24V: F1.1 P9.5 | length 182.4
  Bottom Layer w50: P9.5@3900,2050 3900,1892.91 F1.1@3917.91,1875
COM1: P2.2 U13.3 | length 760.2
  Bottom Layer w20: U13.3@1900,2168.78 2000,2068.78 P2.2@2000,1450
COM2: P2.4 U17.3 | length 760.9
  Bottom Layer w20: U17.3@2100,2168.78 2101.22,2168.78 2200,2070 P2.4@2200,1450
COM3: P4.2 U19.3 | length 760.2
  Bottom Layer w20: U19.3@2300,2168.78 2400,2068.78 P4.2@2400,1450
COM4: P4.4 U23.3 | length 760.2
  Bottom Layer w20: U23.3@2500,2168.78 2600,2068.78 P4.4@2600,1450
COM5: P6.2 U25.3 | length 760.2
  Bottom Layer w20: U25.3@2700,2168.78 2800,2068.78 P6.2@2800,1450
COM6: P6.4 U29.3 | length 760.2
  Bottom Layer w20: U29.3@2900,2168.78 3000,2068.78 P6.4@3000,1450
COM9: D10.1 D39.2 P5.2 | length 1200.7
  Top Layer w20: D39.2@2917.52,3650 2917.52,3732.48 2855,3795 2855,4000 2835,4020 2835,4115 2880,4160 2880,4405 P5.2@3050,4575
  Bottom Layer w20: D10.1@2950,4463.98 2950,4475 P5.2@3050,4575
COM10: D20.1 D44.2 P7.6 | length 1224.3
  Top Layer w20: D44.2@3117.52,3650 3117.52,3707.48 3050,3775 3050,4375 P7.6@3250,4575
  Bottom Layer w20: D20.1@3150,4463.98 3150,4475 P7.6@3250,4575 P7.6@3250,4538.98
COM11: D30.1 D46.2 P7.4 | length 1188.3
  Top Layer w20: D46.2@3317.52,3650 3317.52,3692.48 3250,3760 3250,4375 P7.4@3450,4575
  Bottom Layer w20: D30.1@3350,4463.98 3450,4563.98 P7.4@3450,4575
COM12: D42.1 D48.2 P7.2 | length 1206.2
  Top Layer w20: D48.2@3517.52,3650 3517.52,3717.52 3645,3845 3645,4040 3725,4120 3725,4520 3670,4575 P7.2@3650,4575
  Bottom Layer w20: D42.1@3550,4463.98 3650,4563.98 P7.2@3650,4575
COMM: P8.2 U14.3 U18.3 U20.3 U24.3 U26.3 U30.3 | length 2025.6
  Bottom Layer w20: P8.2@3200,1450 3200,2068.78 U14.3@3100,2168.78 3147.56,2216.34 3212.77,2216.34 3214.11,2215 3255,2215 3256.34,2216.34 3293.66,2216.34 ; U18.3@3300,2168.78 3300,2210 3293.66,2216.34 ; U20.3@3500,2168.78 3500,2210 3493.66,2216.34 ; U24.3@3700,2168.78 3700,2210 3693.66,2216.34 ; U26.3@3900,2168.78 3900,2210 3893.66,2216.34 ; U30.3@4100,2168.78 4100,2210 4093.66,2216.34 3893.66,2216.34 ; 3293.66,2216.34 3493.66,2216.34 ; 3493.66,2216.34 3693.66,2216.34 ; 3693.66,2216.34 3893.66,2216.34
GND: C1.2 C2.2 C3.1 C4.2 C5.1 C6.1 C7.1 D49.2 D52.1 J1.5 J1.shd J2.1 J2.8 M1.2 P9.4 P9.6 P11.6 SW1.1 U1.4 U2.4 U3.4 U4.4 U5.4 U6.4 U7.4 U8.4 U9.4 U10.4 U11.4 U12.4 U15.1 U15.4 U16.1 U16.4 U21.1 U21.4 U22.1 U22.4 U27.1 U27.4 U28.1 U28.4 U31.2 U32.1 U33.8 U33.18 U33.30 U33.38 U34.2 U35.5 | length 3990.7
  Top Layer w15: v1@2387,3204 2389,3204 v1(2391,3202) ; U33.18@2927.44,3066.5 3026.5,3066.5 v1(3040,3080) ; SW1.1@3731,3079 3789,3079 v1(3820,3110) ; v1(4360,2970) 4410,3020 D49.2@4410,3117.52
  Top Layer w40: v1(4040,2940) 4070,2970 v1(4360,2970) 4360,2630 4460,2530 4460,2300 ; U31.2@4270,2370 4280,2360 4400,2360 4460,2300 ; v1(4460,1720) 4460,2300
  Bottom Layer w15: U15.1@2037.4,2505.59 2037.4,2547.4 2057.5,2567.5 v1(2057.5,2567.55) ; U34.2@2173.31,3090 2260,3090 v1(2270,3100) ; U21.1@2437.4,2505.59 2440,2508.19 2440,2567.5 v1(2442.5,2570) ; v1(2670,2270) v1@2680,2260 ; U27.1@2837.4,2505.59 2840,2508.19 2840,2560 v1(2850,2570) ; v1(3070,2270) v1@3080,2260 ; U16.1@3237.4,2505.59 3237.4,2557.4 v1(3250,2570) ; U22.1@3637.4,2505.59 3637.4,2617.4 v1(3645,2625) ; v1@3680,2260 v1(3680,2265)
  Bottom Layer w40: P9.4@3800,1450 P9.6@4000,1450 4090,1540 M1.2@4090,1687.52 4150.51,1627.01 D52.1@4280,1627.01 4367.01,1627.01 v1(4460,1720) ; C2.2@3960,2941.77 3961.77,2940 v1(4040,2940) ; U32.1@4250.55,2815.83 4299.62,2815.83 4352.02,2868.23 C1.2@4360,2868.23 v1(4360,2970)
  other v1: 2270,2270 2844.1,3179.14
IN_GND: D8.1 D9.1 D18.1 D19.1 D28.1 D29.1 D31.2 D32.2 D33.2 D34.2 D38.2 D40.1 D41.1 D43.2 D45.2 D47.2 P5.4 | length 5515.5
  Top Layer w20: v1(1975,4150) 1975,3995 2082.48,3887.52 ; D31.2@2082.48,3800 2082.48,3887.52 ; D33.2@2182.48,3650 2182.48,3697.52 2160,3720 2160,3810 2110,3860 ; D43.2@2317.52,3650 2317.52,3764.96 D38.2@2282.48,3800 2282.48,3837.52 2260,3860 ; D45.2@2417.52,3800 2417.52,3832.48 2390,3860 ; D47.2@2517.52,3650 2517.52,3697.52 2540,3720 2540,3830 2510,3860 ; D32.2@2617.52,3800 2617.52,3832.48 2590,3860 ; v1(2650,4175) 2650,3880 2670,3860 ; D34.2@2717.52,3650 2720,3652.48 2720,3690 2750,3720 2750,3840 2730,3860 2590,3860 ; 2082.48,3887.52 2110,3860 ; 2110,3860 2260,3860 ; 2260,3860 2390,3860 ; 2390,3860 2510,3860 ; 2510,3860 2590,3860
  Top Layer w30: v1(1975,4150) 2000,4150 2150,4300 ; v1(2225,4075) 2150,4150 2150,4300 ; v1(2350,4500) 2400,4450 ; v1(2450,4175) 2450,4225 2375,4300 2375,4400 2425,4450 ; v1(2550,4500) 2600,4450 ; v1(2650,4175) 2600,4225 2600,4400 2650,4450 ; P5.4@2850,4575 2850,4525 2775,4450 2650,4450 ; 2150,4300 v1(2150,4450) 2400,4450 ; 2400,4450 2425,4450 ; 2425,4450 2600,4450 ; 2600,4450 2650,4450
  Bottom Layer w30: v1(1975,4150) 2011.02,4186.02 D8.1@2050,4186.02 ; D18.1@2150,4363.98 v1(2150,4450) ; v1(2225,4075) 2250,4100 D28.1@2250,4136.02 ; D40.1@2350,4363.98 v1(2350,4500) ; D9.1@2450,4136.02 v1(2450,4175) ; D19.1@2550,4363.98 v1(2550,4500) ; D29.1@2650,4136.02 v1(2650,4175) ; D41.1@2750,4363.98 2850,4463.98 P5.4@2850,4575
LED_X1: D31.1 U1.3 | length 461.8
  Top Layer w20: v1(1890,3510) 1890,3740 1950,3800 D31.1@2017.52,3800
  Bottom Layer w20: v1(1890,3510) 1900,3520 U1.3@1900,3585.24
LED_X2: D33.1 U4.3 | length 242.8
  Top Layer w20: v1(2075,3505) 2075,3607.48 D33.1@2117.52,3650
  Bottom Layer w20: v1(2075,3505) U4.3@2075,3585.24
LED_X3: D38.1 U7.3 | length 390.8
  Top Layer w20: D38.1@2217.52,3800 2215,3797.48 2215,3725 2250,3690 v1(2250,3505)
  Bottom Layer w20: v1(2250,3505) U7.3@2250,3585.24
LED_X4: D43.1 U10.3 | length 242.8
  Top Layer w20: D43.1@2382.48,3650 2382.48,3547.52 v1(2425,3505)
  Bottom Layer w20: v1(2425,3505) U10.3@2425,3585.24
LED_X5: D45.1 U2.3 | length 476.5
  Top Layer w20: D45.1@2482.48,3800 2482.48,3697.48 2465,3680 2465,3575 2535,3505 v1(2600,3505)
  Bottom Layer w20: v1(2600,3505) U2.3@2600,3585.24
LED_X6: D47.1 U5.3 | length 332.8
  Top Layer w20: D47.1@2582.48,3650 2727.48,3505 v1(2775,3505)
  Bottom Layer w20: v1(2775,3505) U5.3@2775,3585.24
LED_X7: D32.1 U8.3 | length 570.8
  Top Layer w20: D32.1@2682.48,3800 2682.48,3727.48 2660,3705 2660,3625 2705,3580 2785,3580 2855,3510 v1(2905,3510)
  Bottom Layer w20: v1(2905,3510) 2950,3555 U8.3@2950,3585.24
LED_X8: D34.1 U11.3 | length 446.5
  Top Layer w20: D34.1@2782.48,3650 2857.48,3575 2935,3575 3000,3510 v1(3075,3510)
  Bottom Layer w20: v1(3075,3510) 3125,3560 U11.3@3125,3585.24
LED_X9: D39.1 U3.3 | length 418.8
  Top Layer w20: D39.1@2982.48,3650 2982.48,3642.52 3050,3575 3090,3575 3150,3515 v1(3250,3515)
  Bottom Layer w20: v1(3250,3515) 3300,3565 U3.3@3300,3585.24
LED_X10: D44.1 U6.3 | length 407
  Top Layer w20: D44.1@3182.48,3650 3190,3650 3325,3515 v1(3455,3515)
  Bottom Layer w20: v1(3455,3515) 3475,3535 U6.3@3475,3585.24
LED_X11: D46.1 U9.3 | length 390.2
  Top Layer w20: D46.1@3382.48,3650 3390,3650 3535,3505 v1(3620,3505)
  Bottom Layer w20: v1(3620,3505) 3650,3535 U9.3@3650,3585.24
LED_X12: D48.1 U12.3 | length 362.3
  Top Layer w20: D48.1@3582.48,3650 3727.48,3505 v1(3790,3505)
  Bottom Layer w20: v1(3790,3505) 3825,3540 U12.3@3825,3585.24
LED_Y1: D1.2 U13.2 U15.6 | length 466.8
  Top Layer w15: v1(1930,2620) 1932.48,2617.52 D1.2@1932.48,2450
  Bottom Layer w15: U13.2@1900,2391.22 1900,2490 1915.59,2505.59 U15.6@1962.6,2505.59 1962.6,2587.4 v1(1930,2620)
LED_Y2: D6.2 U15.3 U17.2 | length 268.4
  Top Layer w15: v1(2050,2380) 2050,2432.48 D6.2@2067.52,2450
  Bottom Layer w15: v1(2050,2380) 2037.4,2392.6 U15.3@2037.4,2454.41 2075.59,2454.41 2100,2430 U17.2@2100,2391.22
LED_Y3: D11.2 U19.2 U21.6 | length 466.8
  Top Layer w15: v1(2330,2620) 2330,2452.48 D11.2@2332.48,2450
  Bottom Layer w15: U19.2@2300,2391.22 2300,2490 2315.59,2505.59 U21.6@2362.6,2505.59 2362.6,2587.4 v1(2330,2620)